# Altium PCB DiplomPCB.PcbDoc
Units mm, origin at the board's own origin, x right, y up, seen from the top; angles counter-clockwise.
Board outline 111.49 x 52.99 mm, 2 copper layers (Top Layer, Bottom Layer); 43 components, 35 nets, 199 pads, 49 vias.
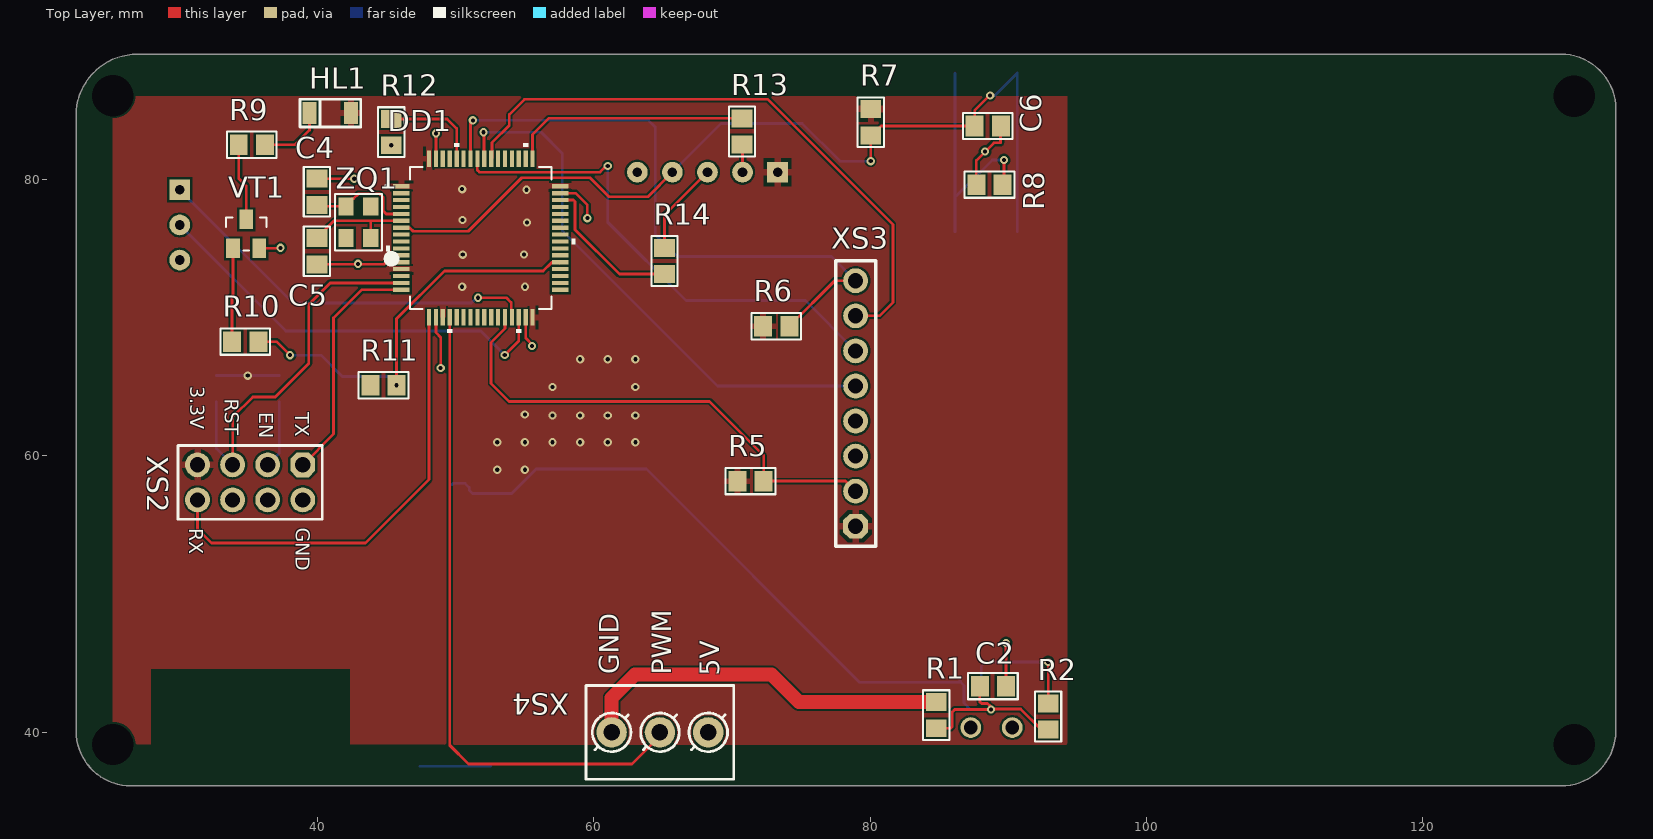
[diagram p0: Top Layer view]
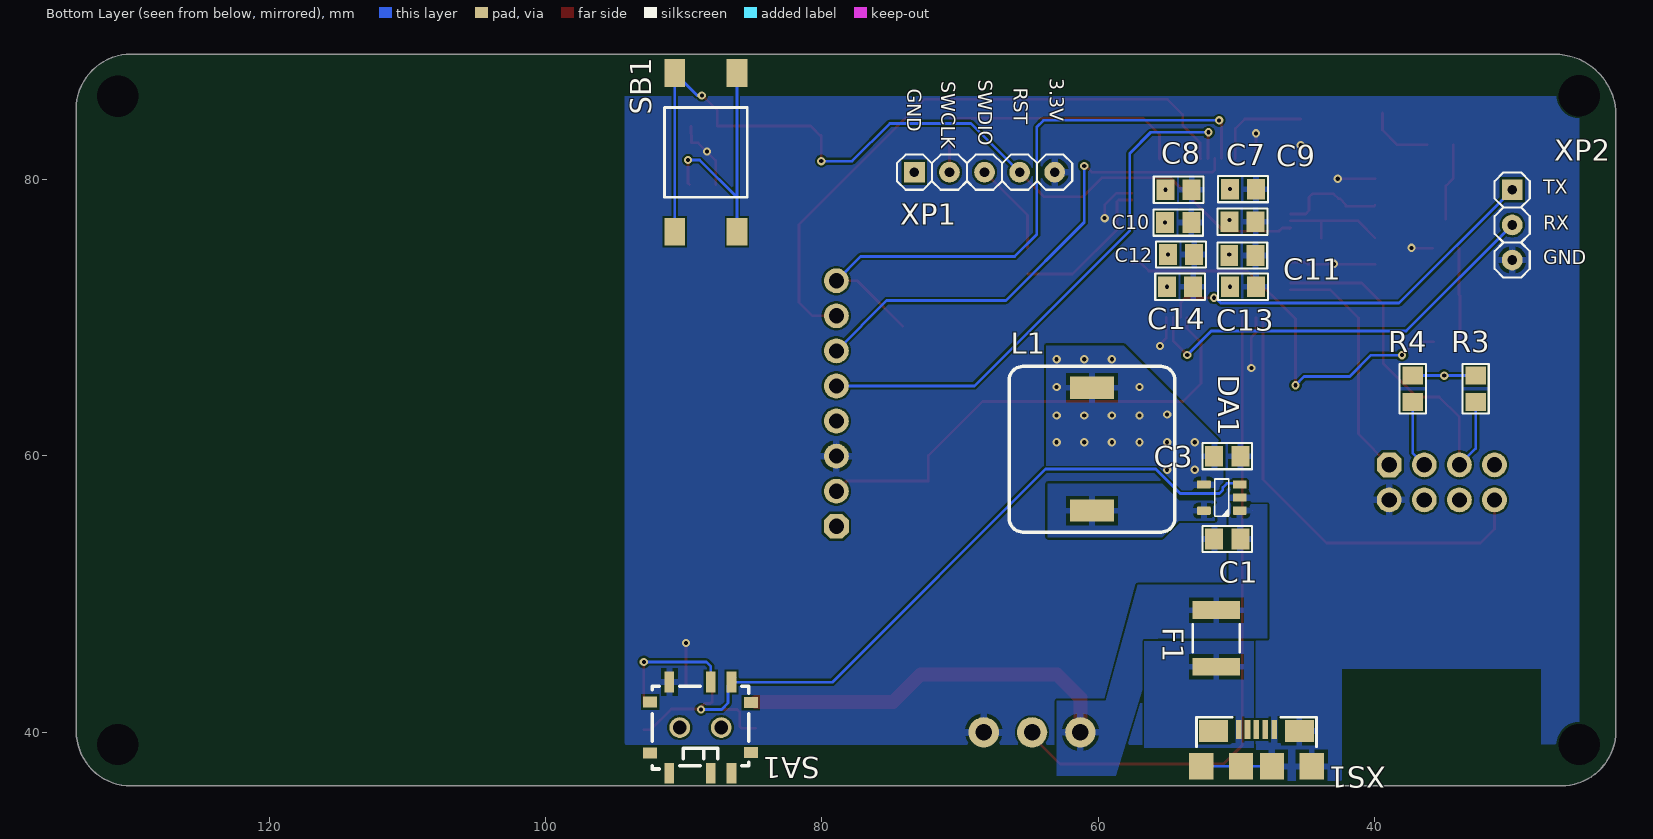
[diagram p1: Bottom Layer view, seen from below]

## Layer stack, top to bottom
Top Solder: solder mask 0.0102, Solder Resist, Dk 3.5
Top Layer: signal copper 0.0356
Dielectric 1: dielectric 0.32, FR-4, Dk 4.8
Bottom Layer: signal copper 0.0356
Bottom Solder: solder mask 0.0102, Solder Resist, Dk 3.5

## Board outline
26.475,36.109 cw(c26.475,40.075) 22.509,40.075 22.51,40.05 22.505,84.665 cw(c26.935,84.665) 26.935,89.094 26.84,89.1 130.02,89.1 130,89.1 cw(c130,85.1) 134,85.1 134,85.12 133.988,40.065 cw(c130.033,40.065) 130.033,36.11

## Design rules (kind name [scope] priority, off if disabled: settings)
Clearance [All] p1: gap=0.15 ignorepadtopadclearanceinfootprint=FALSE
PolygonConnect [All] p1: thpad.connectstyle=Relief thpad.reliefconductorwidth=0.5 thpad.reliefentries=4 thpad.polygonreliefangle="90 Angle" thpad.airgapwidth=0.25 smdpad.connectstyle=Relief smdpad.reliefconductorwidth=0.45 smdpad.reliefentries=4 smdpad.polygonreliefangle="90 Angle" smdpad.airgapwidth=0.25 via.connectstyle=Direct via.reliefconductorwidth=0.5 via.reliefentries=4 via.polygonreliefangle="90 Angle" via.airgapwidth=0.5
RoutingVias [All] p1: holewidth=0.3 width=0.6 viastyle="Through Hole" minholewidth=0.3 minwidth=0.6 maxholewidth=0.3 maxwidth=0.6
SMDEntry [All] p1: side=TRUE corner=TRUE anyangle=TRUE
SMDNeckDown [All] p1: percent=70.000
SMDToCorner [All] p1: distance=196850
SMDToPlane [All] p1: distance=196850
SolderMaskExpansion [All] p1: expansion=0.102 istentingtop=FALSE
UnRoutedNet [All] p1: checkbadconnections=TRUE
Width [All] p1: maxlimit=1 minlimit=0.15 preferedwidth=0.2
29 further rules are at their usual default settings.

## Components (designator, comment, footprint, x,y, rotation, side; value= is the part's Value field where it differs from the comment)
C1 "47p" C0805 50.64,53.99 r180 bottom
C2 "47p" C0805 88.89,43.335 r180 top
C3 "47p" C0805 50.64,59.99 r0 bottom
C4 "47p" C0805 39.94,79.132 r270 top
C5 "47p" C0805 39.94,74.832 r90 top
C6 "47p" C0805 88.52,83.89 r180 top
C7 "47p" C0805 49.51,79.322 r180 bottom
C8 "47p" C0805 54.17,79.282 r180 bottom
C9 "47p" C0805 49.54,76.962 r180 bottom
C10 "47p" C0805 54.2,76.9 r180 bottom
C11 "47p" C0805 49.55,74.522 r180 bottom
C12 "47p" C0805 53.99,74.592 r180 bottom
C13 "47p" C0805 49.51,72.252 r180 bottom
C14 "47p" C0805 54.06,72.252 r180 bottom
DA1 "SOT23-5" SOT23-5 51.04,56.99 r0 bottom
DD1 "STM32F103RDT6" LQFP64-10x10mm 51.81,75.782 r0 top
F1 "0.14A-60V" FUSRC4632X90N 51.44,46.79 r90 bottom
HL1 "LED, *, *, *, -55...+150°C" "LED: 1206R" 40.91,84.83 r180 top
L1 "2.2u" CDRH103R 60.44,60.49 r0 bottom
R1 "Resistor film, 100R, ±5%, 1206, 0.25W, -55...+125°C" R0805 84.79,41.235 r90 top value=100R
R2 "Resistor film, 100R, ±5%, 1206, 0.25W, -55...+125°C" R0805 92.89,41.135 r270 top value=100R
R3 "Resistor film, 100R, ±5%, 1206, 0.25W, -55...+125°C" R0805 32.66,64.87 r90 bottom value=100R
R4 "Resistor film, 100R, ±5%, 1206, 0.25W, -55...+125°C" R0805 37.21,64.87 r90 bottom value=100R
R5 "Resistor film, 100R, ±5%, 1206, 0.25W, -55...+125°C" R0805 71.34,58.18 r180 top value=100R
R6 "Resistor film, 100R, ±5%, 1206, 0.25W, -55...+125°C" R0805 73.2,69.4 r180 top value=100R
R7 "Resistor film, 100R, ±5%, 1206, 0.25W, -55...+125°C" R0805 80.04,84.17 r90 top value=100R
R8 "Resistor film, 100R, ±5%, 1206, 0.25W, -55...+125°C" R0805 88.64,79.65 r0 top value=100R
R9 "Resistor film, 100R, ±5%, 1206, 0.25W, -55...+125°C" R0805 35.23,82.54 r0 top value=100R
R10 "Resistor film, 100R, ±5%, 1206, 0.25W, -55...+125°C" R0805 34.75,68.28 r0 top value=100R
R11 "Resistor film, 100R, ±5%, 1206, 0.25W, -55...+125°C" R0805 44.76,65.12 r0 top value=100R
R12 "Resistor film, 100R, ±5%, 1206, 0.25W, -55...+125°C" R0805 45.325,83.45 r270 top value=100R
R13 "Resistor film, 100R, ±5%, 1206, 0.25W, -55...+125°C" R0805 70.725,83.5 r270 top value=100R
R14 "Resistor film, 100R, ±5%, 1206, 0.25W, -55...+125°C" R0805 65.11,74.12 r90 top value=100R
SA1 "SSSS820101" SSSS820101 88.79,40.335 r180 bottom
SB1 "Text" ПКн159-3_4-Series 88.4,81.98 r0 bottom value=ПКн159-3
VT1 "BSR802NL6327HTSA1" SOT23 34.82,76.09 r0 top
XP1 "SWD" PLS5R 73.3,80.55 r180 bottom
XP2 "Connector, 3pin, 2.54mm, 500VAC, 3A" PLS3R 30.01,79.27 r270 bottom
XS1 "USB micro B" "CON: USB micro-A (ZX62-B-5PA)" 48.531,40.19 r180 bottom
XS2 "Connector, 8pin, 2.54mm, 500VAC, 3A" "CON: PBD-8" 35.11,58.09 r180 top
XS3 "Connector, 8pin, 2.54mm, 500VAC, 3A" "CON: PBS-8" 78.95,63.8 r90 top
XS4 "Terminal connector, 3pin, 3.5mm, 300VAC, 10A" "CON: DG350-3.5-03P" 64.78,39.99 r0 top
ZQ1 "QSMD3.2x2.5x0.8" QSMD3.2x2.5x0.8 42.94,76.932 r90 top

## Footprints (in the part's own frame and the unit in brackets; to place one, negate y for a bottom-side part, rotate by r counter-clockwise, add the part's x,y. Pads: shape width x height; smd on the part's side, far side on the other; paste and mask are expansions set on the pad)
C0805 [mm] "IPC-SM-782 Capacitor 2.0x1.2 mm"
  rect 1.3x1.5 smd: 1(-0.95,0) 2(0.95,0)
  silkscreen extent -1.8,-0.95 1.8,0.95, body extent -1,-0.63 1,0.63, height 0.57
CDRH103R [mm] "Ind Power Shielded Wirewound"
  rect 3.2x1.6 smd: 1(0,4.45) 2(0,-4.45)
  silkscreen extent -6,-6 6,6, body extent -5.15,-5.22 5.15,5.28, height 4
"CON: DG350-3.5-03P" [mm]
  round 2.2 hole 1.2: 1(-3.5,0) 2(0,0) 3(3.5,0)
  round 0.5 on Top Overlay: ""(-4.85,-2.9)
  silkscreen extent -5.35,-3.4 5.35,3.4, body extent -5.75,-3.4 5.75,3.4, height 8.4
"CON: PBD-8" [mm] "PBD-8"
  oct 1.8x1.8 hole 1.1: 1(-3.81,-1.27)
  round 1.8 hole 1.1: 2(-3.81,1.27) 3(-1.27,-1.27) 4(-1.27,1.27) 5(1.27,-1.27) 6(1.27,1.27) 7(3.81,-1.27) 8(3.81,1.27)
  silkscreen extent -5.22,-2.68 5.22,2.67, body extent -7.3,-3.1 7.2,21.9, height 14.3
"CON: PBS-8" [mm] "PBS-8"
  oct 1.8x1.8 hole 1.1: 1(-8.89,0)
  round 1.8 hole 1.1: 2(-6.35,0) 3(-3.81,0) 4(-1.27,0) 5(1.27,0) 6(3.81,0) 7(6.35,0) 8(8.89,0)
  silkscreen extent -10.35,-1.45 10.35,1.45, body extent -20.34,-57.73 19.66,2.27, height 16.74
"CON: USB micro-A (ZX62-B-5PA)" [mm]
  rect 1.8x1.9 smd: 0(-4,-2.65) 0(4,-2.65)
  rect 2.1x1.6 smd: 0(-3.1,-0.1) 0(3.1,-0.1)
  rect 1.75x1.9 smd: 0(-1.125,-2.65) 0(1.125,-2.65)
  rect 0.4x1.4 smd: 1(-1.3,0) 2(-0.65,0) 3(0,0) 4(0.65,0) 5(1.3,0)
  round 0.5 on Bottom Overlay: ""(-4.85,0.75)
  silkscreen extent -4.35,-1.25 4.35,0.9, body extent -3.9,-4.8 3.9,0.2, height 2.68
FUSRC4632X90N [mm] "Chip Resettable Fuse, 2-Leads, Body 4.6x3.2mm, IPC Medium Density"
  rect 1.3x3.45 smd: 1(-2.05,0) 2(2.05,0)
  silkscreen extent -1,-1.7 1,1.7, body extent -2.36,-1.7 2.37,1.71, height 0.89
"LED: 1206R" [mm]
  rect 1x1.6 smd: 1(-1.5,0) 2(1.5,0)
  silkscreen extent -2.2,-1 2.2,1, body extent -1.6,-0.8 1.6,0.8, height 1.1
LQFP64-10x10mm [mil]
  rect 47x12 smd paste+0 mask+0: 1(-226.38,147.64) 2(-226.38,127.95) 3(-226.38,108.27) 4(-226.38,88.58) 5(-226.38,68.9) 6(-226.38,49.21) 7(-226.38,29.53) 8(-226.38,9.84) 9(-226.38,-9.84) 10(-226.38,-29.53) 11(-226.38,-49.21) 12(-226.38,-68.9) 13(-226.38,-88.58) 14(-226.38,-108.27) 15(-226.38,-127.95) 16(-226.38,-147.64) 33(226.38,-147.64) 34(226.38,-127.95) 35(226.38,-108.27) 36(226.38,-88.58) 37(226.38,-68.9) 38(226.38,-49.21) 39(226.38,-29.53) 40(226.38,-9.84) 41(226.38,9.84) 42(226.38,29.53) 43(226.38,49.21) 44(226.38,68.9) 45(226.38,88.58) 46(226.38,108.27) 47(226.38,127.95) 48(226.38,147.64)
  rect 12x47 smd paste+0 mask+0: 17(-147.64,-226.38) 18(-127.95,-226.38) 19(-108.27,-226.38) 20(-88.58,-226.38) 21(-68.9,-226.38) 22(-49.21,-226.38) 23(-29.53,-226.38) 24(-9.84,-226.38) 25(9.84,-226.38) 26(29.53,-226.38) 27(49.21,-226.38) 28(68.9,-226.38) 29(88.58,-226.38) 30(108.27,-226.38) 31(127.95,-226.38) 32(147.64,-226.38) 49(147.64,226.38) 50(127.95,226.38) 51(108.27,226.38) 52(88.58,226.38) 53(68.9,226.38) 54(49.21,226.38) 55(29.53,226.38) 56(9.84,226.38) 57(-9.84,226.38) 58(-29.53,226.38) 59(-49.21,226.38) 60(-68.9,226.38) 61(-88.58,226.38) 62(-108.27,226.38) 63(-127.95,226.38) 64(-147.64,226.38)
  silkscreen extent -273,-270 270,270, body extent -231,-231 241,241, height 63
PLS3R [mm] "DS1021 Male Connector 3 pins 2.54 mm Corner"
  rect 1.5x1.5 hole 0.7: 1(0,0)
  round 1.5 hole 0.7: 2(2.54,0) 3(5.08,0)
  silkscreen extent -1.27,-1.27 6.35,1.27, body extent -1.27,-1.27 6.35,7.35, height 5.45
PLS5R [mm] "DS1021 Male Connector 5 pin 2.54 mm Corner"
  rect 1.5x1.5 hole 0.7: 1(0,0)
  round 1.5 hole 0.7: 2(2.54,0) 3(5.08,0) 4(7.62,0) 5(10.16,0)
  silkscreen extent -1.27,-1.27 11.43,1.27, body extent -1.27,-1.27 11.43,7.35, height 5.45
QSMD3.2x2.5x0.8 [mm] "Quartz Crystal SMD 3.2x2.5x0.8 mm"
  rect 1.3x1.1 smd: 1(-1.15,-0.9) 2(1.15,-0.9) 3(1.15,0.9) 4(-1.15,0.9)
  silkscreen extent -3.15,-2.9 2.05,1.7, body extent -1.61,-1.25 1.61,1.25, height 0.81
R0805 [mm] "IPC-SM-782 Resistor 2.0x1.2 mm"
  rect 1.3x1.5 smd: 1(-0.95,0) 2(0.95,0)
  silkscreen extent -1.8,-0.95 1.8,0.95, body extent -1.15,-0.67 1.15,0.68, height 0.76
SOT23 [mm] "IPC-SM-782 Small Outline Transistor"
  rect 1x1.4 smd: 1(-0.95,-1.05) 2(0.95,-1.05) 3(0,1.05)
  silkscreen extent -1.46,-1.2 1.46,1.17, body extent -1.46,-1.17 1.46,1.17, height 1
SOT23-5 [mm]
  round 0.5 on Mech15: 0(0,0)
  rrect25% 1x0.6 smd: 1(-1.3,0.95) 2(-1.3,0) 3(-1.3,-0.95) 4(1.3,-0.95) 5(1.3,0.95)
  silkscreen extent -0.51,-1.35 0.51,1.35, body extent -1.4,-1.45 1.4,1.45, height 1.44
SSSS820101 [mm] "Vertical angle SMD 2 position key"
  rect 0.7x1.5 smd: 1(-2.25,3.3) 2(0.75,3.3) 3(2.25,3.3) 4(-2.25,-3.3) 5(0.75,-3.3) 6(2.25,-3.3)
  rect 1x0.8 smd: GND(-3.65,-1.85) GND(-3.65,1.85) GND(3.65,-1.8) GND(3.65,1.8)
  round 1.5 hole 1: GND(-1.5,0) GND(1.5,0)
  silkscreen extent -3.5,-3 3.5,3, body extent -3.25,-2.75 3.25,2.75, height 3
ПКн159-3_4-Series [mm]
  rect 1.5x2 smd: 1(-2.25,-5.75) 1(-2.25,5.75) 2(2.25,-5.75) 2(2.25,5.75)
  silkscreen extent -3,-3.25 3,3.25, body extent -3,-5.18 3,5.18, height 7.33

## Part data
C1 C2 C3 C4 C5 C6 C7 C8 C9 C10 C11 C12 C13 C14: library part CC1206_47PF_100V_10%_NP0, "Non-polarised capacitor", Case=1206, Manufacturer=GENERIC, Manufacturer1 ComponentHeight=0.94mm, Manufacturer1 Example=AVX, Manufacturer1 Part Number=12061A470JAT2A, Tolerance=±10%, Voltage=100V, Author="CERN DEM JLC", Component Type=Standard, CreateDate=24-Aug-09, HelpURL=\\cern.ch\dfs\Applications\Altium\Datasheets\CC1206_NP0_AVX.pdf, LatestRevisionDate=24-Aug-09, Manufacturer Part Number=CC1206_47PF_100V_10%_NP0, Mounted=Yes, Part Description="SMD Multilayer Chip Ceramic Capacitor", Part Number=CC1206_47PF_100V_10%_NP0, Pin Count=2, SMD=Yes, Socket=No, Status=Preferred, TC=NP0
DA1: library part LM3671MF-3.3/NOPB, "GOST DC-DC Step-down converter 2.7-5.5 to 3.3V 600mA output"
DD1: "No Description Available", Built_By=EMA_UL_Team, Copyright="Copyright (C) 2018 Accelerated Designs. All rights reserved", Manufacturer_Part_Number=STM32F103RDT6, RefDes=RefDes, SourceLibrary=Updates_to_database_2020-10-19, Type=DEV, Vendor=STMicroelectronics
F1: library part FUSR1812_TYCO-miniSMD0114F, "Fuse", Manufacturer="TYCO ELECTRONICS", Manufacturer Part Number=miniSMDC014F, Author="CERN DEM JLC", Component Type=Standard, ComponentHeight=0.89mm, CreateDate=02-Jul-08, Family="Fuses Resettable", HelpURL=\\cern.ch\dfs\Applications\Altium\Datasheets\FUSR_TYCO_MiniSMD0114F.pdf, LatestRevisionDate=17-Mar-10, Mounted=Yes, PackageDescription="Chip Resettable Fuse, 2-Leads, Body 4.6x3.2mm, IPC Medium Density", Part Description="PolySwitch® PTC Overcurrent Protection Device", Part Number=FUSR1812_TYCO-miniSMD0114F, Pin Count=2, SMD=Yes, Socket=No
HL1: library part LED_single, Color=GREEN, Temperature=-55...+150°C, TypeDiode=LED, ValueManufacturerPartNumber="LED, *, *, *, -55...+150°C"
L1: library part Inductive, "GOST inductive"
R1 R2 R3 R4 R5 R6 R7 R8 R9 R10 R11 R12 R13 R14: library part Resistor_1206, Manufacturer=Yageo, Package=1206, PartNumber=RC1206JR-07100RL, Power=0.25W, Temperature=-55...+125°C, Tolerance=±5%, TypeResistor="Resistor film", HelpURL=https://www.digikey.com/product-detail/en/yageo/RC1206JR-07100RL/311-100ERCT-ND/732153, ValueManufacturerPartNumber="Resistor film, 100R, ±5%, 1206, 0.25W, -55...+125°C"
SA1: library part Button_Perekluchatel, "GOST Button Perekluchatel"
SB1: library part ПКн159-3, Isolator Resistance=1000meg, Limit Current=50mA, Limit Voltage=15V, Resistance=0.1ohm, Working Temperature Max=+60°С, Working Temperature Min=-60°С, Application Category=1, Backlight=NO, Height=5.2mm, ID=24, Number of Contacts=4, Part Number=ПКн159-3, Published=17.04.2014, Publisher="Andrew Danich", Specification="АУБК.642130.004 ТУ", Type=Переключатель
VT1: library part MOSFET_N, "GOST MOSFET N-channel transistor"
XP1: "Serial Wire Debugging", ComponentLink1Description="Datasheet for Hitec Servo", ComponentLink1URL=https://www.arm.com/files/pdf/Serial_Wire_Debug.pdf, Published=24.01.2018, Publisher="Kernel Laboratory", Version=1.0
XP2: library part PLS-3, CurrentMax=3A, Manufacturer=Connfly, VoltageMax=500VAC, CommentText="\"Разъем\"", HelpURL=https://www.chipdip.ru/product/pls-3, Multichannel=3pin, PartNumber=PLS-3, Pitch=2.54mm, TypeConnector=Connector, ValueManufacturerPartNumber="Connector, 3pin, 2.54mm, 500VAC, 3A"
XS1: library part Connector_USB_micro_B, Manufacturer="Hirose Electric", PartNumber=ZX62-B-5PA, CommentText="\"USB\"", HelpURL=https://www.digikey.com/product-detail/en/hirose-electric-co-ltd/ZX62-B-5PA/H11579CT-ND/1851090, TypeConnector="USB micro B", ValueManufacturerPartNumber="USB micro B"
XS2: library part PBD-8, CurrentMax=3A, Manufacturer=Connfly, VoltageMax=500VAC, CommentText="\"Разъем\"", HelpURL=https://www.chipdip.ru/product/pbd-8, Multichannel=8pin, PartNumber=PBD-8, Pitch=2.54mm, TypeConnector=Connector, ValueManufacturerPartNumber="Connector, 8pin, 2.54mm, 500VAC, 3A"
XS3: library part PBS-8, CurrentMax=3A, Manufacturer=Connfly, VoltageMax=500VAC, CommentText="\"Разъем\"", HelpURL=https://www.chipdip.ru/product/pbs-8, Multichannel=8pin, PartNumber=PBS-8, Pitch=2.54mm, TypeConnector=Connector, ValueManufacturerPartNumber="Connector, 8pin, 2.54mm, 500VAC, 3A"
XS4: library part Connector_terminal_3pin, CurrentMax=10A, Manufacturer=Degson, PartNumber=DG350-3.5-03P-14, VoltageMax=300VAC, CommentText="\"Разъем\"", HelpURL=https://www.chipdip.ru/product/dg350-3.5-03p-12, Multichannel=3pin, Pitch=3.5mm, TypeConnector="Terminal connector", ValueManufacturerPartNumber="Terminal connector, 3pin, 3.5mm, 300VAC, 10A"
ZQ1: library part Quartz, "GOST Quartz"

## Free pads (board coordinates)
  round 0 hole 3: 4(25.16,39.11) 4(25.16,86.1) 4(131,39.11) 4(131,86.06)

## Via types
v1: diameter 0.6, hole 0.3, Top Layer to Bottom Layer, 49 vias

## Nets (pads, with @x,y where several pads share a name; then routed paths per layer and width w, separated by ;. In a path a pad name is that pad's centre, name@x,y a point inside that pad or via, vN(x,y) a via of type N, cw(c..) or ccw(c..) an arc to the next point about the centre after c; other vN are vias at no path point)
+3.3: C3.2 C7.1 C8.1 C9.1 C10.1 C11.1 C12.1 C13.1 C14.1 DA1.4 DD1.1 DD1.13 DD1.19 DD1.32 DD1.48 DD1.64 HL1.1 L1.2 R3.2 R4.2 R5.2 R6.2 R7.2 XP1.1 XS2.7 XS3.1 | length 4.6
  Bottom Layer w0.2: R3.2 R4.2
  other v1: 53,59 54.999,59.001 53,61 55,61 57,61 59,61 61,61 63,61 57,62.925 59,62.925 61,62.925 63,62.925 55,63 57,65 63,65 34.935,65.82 59,67 61,67 63,67 50.46,72.252 55.01,72.252 50.5,74.582 54.94,74.592 55.15,76.9 50.49,77.082 55.12,79.282 50.46,79.322
+5: C1.2 DA1.1 F1.2 R1.2 XS4.1 | length 27.5
  Top Layer w1: XS4.1 61.28,42.483 62.972,44.175 72.85,44.175 74.84,42.185 R1.2
GND: C1.1 C2.1 C3.1 C4.1 C5.1 C6.1 C7.2 C8.2 C9.2 C10.2 C11.2 C12.2 C13.2 C14.2 DA1.2 DD1.12 DD1.18 DD1.31 DD1.47 DD1.63 R8.1 R12.2 SA1.1 VT1.2 XP1.5 XP2.3 XS1.0@44.531,37.54 XS1.0@45.431,40.09 XS1.0@47.406,37.54 XS1.0@49.656,37.54 XS1.0@52.531,37.54 XS1.5 XS2.2 XS3.3 XS4.3 | length 35.1
  Top Layer w0.2: VT1.2 37.28,75.04 v1(37.31,75.07) ; C5.1 44.813,73.882 44.963,74.032 DD1.12 ; C4.1 42.628,80.082 v1(42.64,80.07) ; DD1.18 48.56,68.935 48.9,68.595 v1(48.9,66.375) ; DD1.63 v1(48.56,83.36) ; DD1.31 55.06,68.538 55.52,68.078 v1(55.52,67.97) ; DD1.47 58.657,79.032 59.525,78.164 v1(59.525,77.225) ; R8.1 87.69,81.411 88.956,82.677 89.444,82.677 C6.1 ; C2.1 v1(89.84,46.465) v1@89.85,46.475
  Bottom Layer w0.2: XS1.0@47.406,37.54 49.656,37.54 XS1.0@52.531,37.54
  other v1: 42.91,73.91 88.323,82.044 45.325,82.5
NetC2_2: C2.2 DA1.3 R1.1 R2.2 SA1.3 | length 60.8
  Top Layer w0.2: R1.1 85.833,40.285 85.95,40.402 85.95,41.475 86.125,41.65 v1(88.75,41.65) ; C2.2 87.94,42.204 88.057,42.086 88.504,42.086 88.673,41.917 88.673,41.727 v1(88.75,41.65) ; R2.2 92.39,40.185 90.9,41.675 88.775,41.675 v1(88.75,41.65)
  Bottom Layer w0.2: DA1.3 49.818,58.018 50.66,58.018 50.968,57.711 50.968,57.524 51.217,57.275 54.05,57.275 55.825,59.05 63.81,59.05 79.248,43.612 SA1.3@86.54,43.612 ; SA1.3@86.29,43.959 86.54,43.709 SA1.3 86.79,43.385 86.79,42.11 87.25,41.65 v1(88.75,41.65)
NetC4_2: C4.2 DD1.5 ZQ1.3 | length 7.8
  Top Layer w0.2: C4.2 40.04,78.082 ZQ1.3 42.04,78.182 42.49,78.632 42.59,78.632 42.94,78.982 44.494,78.982 44.728,78.747 44.728,77.767 44.963,77.532 DD1.5
NetC5_2: C5.2 DD1.6 ZQ1.1 | length 7.9
  Top Layer w0.2: C5.2 41.19,77.032 43.84,77.032 ; ZQ1.1 43.84,77.032 ; DD1.6 43.84,77.032
NetDA1_5: DA1.5 L1.1
NetDD1_15: DD1.15 R3.1 XS2.5 | length 27.3
  Top Layer w0.2: XS2.5 33.84,62.815 35.3,64.275 36.925,64.275 39.35,66.7 39.35,70.975 40.907,72.532 DD1.15
  Bottom Layer w0.2: R3.1 32.66,60.54 XS2.5
NetDD1_16: DD1.16 XS2.1 | length 17.3
  Top Layer w0.2: XS2.1 41.15,61.59 41.15,70.002 43.18,72.032 DD1.16
NetDD1_17: DD1.17 XS2.8 | length 32.9
  Top Layer w0.2: XS2.8 31.3,54.7 32.3,53.7 43.467,53.7 48.06,58.293 DD1.17
NetDD1_20: DD1.20 XS4.2 | length 47.9
  Top Layer w0.2: DD1.20 49.56,39.052 50.912,37.7 62.75,37.7 64.78,39.73 XS4.2
NetDD1_28: DD1.28 R5.1 XS3.2 | length 35.9
  Top Layer w0.2: DD1.28 53.56,69.232 52.55,68.222 52.55,65.25 53.85,63.95 68.375,63.95 72.29,60.035 R5.1 78.22,58.18 XS3.2
NetDD1_29: DD1.29 XP2.1 | length 28.8
  Top Layer w0.2: v1(51.609,71.457) 53.668,71.457 54.008,71.117 54.008,70.084 DD1.29
  Bottom Layer w0.2: XP2.1 38.204,71.076 51.119,71.076 51.501,71.457 v1(51.609,71.457)
NetDD1_30: DD1.30 XP2.2 | length 30.6
  Top Layer w0.2: v1(53.543,67.31) 54.56,68.327 DD1.30
  Bottom Layer w0.2: XP2.2 37.69,69.05 51.803,69.05 v1(53.543,67.31)
NetDD1_37: DD1.37 R10.2 R11.2 | length 29.8
  Top Layer w0.2: R10.2 37.02,68.28 v1(38,67.3) ; v1(45.71,65.12) 45.71,69.935 49.175,73.4 56.325,73.4 56.957,74.032 DD1.37 DD1.37@57.508,73.98
  Bottom Layer w0.2: v1(38,67.3) 40.225,67.3 41.775,65.75 45.08,65.75 v1(45.71,65.12)
NetDD1_46: DD1.46 R14.1 | length 11
  Top Layer w0.2: DD1.46 58.521,78.532 58.638,78.415 58.638,76.382 61.85,73.17 R14.1
NetDD1_49: DD1.49 R13.1 | length 17.4
  Top Layer w0.2: DD1.49@55.56,81.509 DD1.49 55.56,83.285 56.725,84.45 R13.1
NetDD1_55: DD1.55 XS3.7 | length 44.5
  Top Layer w0.2: DD1.55 52.612,81.584 52.612,82.687 53.875,83.95 53.875,84.725 54.975,85.825 72.595,85.825 81.65,76.77 81.65,71.125 80.675,70.15 XS3.7
NetDD1_56: DD1.56 XS3.5 | length 39.8
  Top Layer w0.2: v1(52.01,83.439) 52.035,83.414 52.035,81.557 DD1.56
  Bottom Layer w0.2: v1(52.01,83.439) 56.186,83.439 57.7,81.925 57.7,76.325 68.955,65.07 XS3.5
NetDD1_57: DD1.57 XS3.6 | length 36.4
  Top Layer w0.2: DD1.57 51.56,80.691 51.701,80.55 60.442,80.55 60.892,81 v1(61,81)
  Bottom Layer w0.2: v1(61,81) 61,76.925 66.675,71.25 75.31,71.25 XS3.6
NetDD1_58: DD1.58 R6.1 XS3.8 | length 46.1
  Top Layer w0.2: DD1.58 51.06,84.131 v1(51.232,84.303) ; R6.1 77.44,72.69 XS3.8
  Bottom Layer w0.2: v1(51.232,84.303) 63.957,84.303 64.44,83.82 64.44,76.048 66.04,74.447 77.193,74.447 XS3.8
NetDD1_60: DD1.60 R12.1 | length 7.2
  Top Layer w0.2: R12.1 49.375,84.4 50.06,83.715 DD1.60
NetF1_1: F1.1 XS1.1
NetHL1_2: HL1.2 R9.2 | length 4.9
  Top Layer w0.2: R9.2 38.359,82.54 39.41,83.591 HL1.2
NetR2_1: R2.1 SA1.2 | length 9.1
  Top Layer w0.2: R2.1 v1(92.89,45.085)
  Bottom Layer w0.2: SA1.2 88.04,44.767 88.358,45.085 v1(92.89,45.085)
NetR4_1: R4.1 XS2.3 | length 4.9
  Bottom Layer w0.2: XS2.3 37.21,60.19 R4.1
NetR8_2: R8.2 SB1.1 | length 18
  Top Layer w0.2: R8.2 89.69,79.75 v1(89.69,81.43)
  Bottom Layer w0.2: SB1.1@86.15,76.23 86.15,78.733 ; SB1.1@86.15,87.73 86.15,78.733 ; v1(89.69,81.43) 88.847,81.43 86.15,78.733
NetR9_1: R9.1 VT1.3 | length 5.6
  Top Layer w0.2: R9.1 34.28,80.093 34.82,79.553 VT1.3
NetR10_1: R10.1 VT1.1 | length 6.8
  Top Layer w0.2: R10.1 33.8,71.603 33.87,71.673 VT1.1
NetR13_2: R13.2 XP1.2 | length 2
  Top Layer w0.2: R13.2 70.76,82.515 XP1.2
NetR14_2: R14.2 XP1.3 | length 6.8
  Top Layer w0.2: R14.2 65.11,77.44 XP1.3
NetXS2_4: XS2.4
NetXS2_6: XS2.6
NetXS3_4: XS3.4
RST: C6.2 DD1.7 R7.1 SB1.2 XP1.4 | length 66.1
  Top Layer w0.2: DD1.7 DD1.7@46.086,76.506 ; DD1.7@46.112,76.48 DD1.7@46.086,76.506 ; XP1.4 63.905,78.775 61.1,78.775 59.725,80.15 54.775,80.15 50.9,76.275 46.92,76.275 46.689,76.506 DD1.7@46.086,76.506 ; v1(80.04,81.35) R7.1 80.14,83.22 80.69,83.77 80.69,83.773 80.807,83.89 C6.2 87.57,85.023 88.647,86.1 v1(88.69,86.1)
  Bottom Layer w0.2: XP1.4 69.21,84.08 75.08,84.08 77.81,81.35 v1(80.04,81.35) ; v1(88.69,86.1) 89.02,86.1 90.65,87.73 SB1.2@90.65,76.23
pads on no net: DA1.0 DD1.2 DD1.3 DD1.4 DD1.8 DD1.9 DD1.10 DD1.11 DD1.14 DD1.21 DD1.22 DD1.23 DD1.24 DD1.25 DD1.26 DD1.27 DD1.33 DD1.34 DD1.35 DD1.36 DD1.38 DD1.39 DD1.40 DD1.41 DD1.42 DD1.43 DD1.44 DD1.45 DD1.50 DD1.51 DD1.52 DD1.53 DD1.54 DD1.59 DD1.61 DD1.62 R11.1 SA1.4 SA1.5 SA1.6 SA1.GND XS1. XS1.0@51.631,40.09 XS1.2 XS1.3 XS1.4 XS4. ZQ1.2 ZQ1.4

## Polygon pours and split planes (outlines as drawn)
GND on Bottom Layer "GND_L02_P008" (solid, pour order 8): 48.531,39.109 48.531,36.49 42.35,36.49 42.34,36.5 42.35,36.51 42.35,44.58 27.91,44.58 27.91,39.113 25.16,39.11 25.16,86.1 25.2,86.06 94.29,86.06 94.29,39.1
+3.3 on Bottom Layer "+3.3_L02_P000" (solid, pour order 0): 50.94,57.49 54.14,57.49 55.74,59.09 63.74,59.09 63.74,68 58.15,68 50.94,60.79
NetDA1_5 on Bottom Layer "NETDA1_5_L02_P002" (solid, pour order 2): 51.54,56.768 51.54,55.312 54.148,55.312 55.352,54.107 63.652,54.107 63.652,58.007 55.352,58.007 54.113,56.768
+5 on Bottom Layer "+5_L02_P004" (solid, pour order 4): 50.54,50.69 50.54,56.49 47.74,56.49 47.74,46.79 55.66,46.79 58.71,36.84 63,36.84 63,42.28 59.44,42.28 57.14,50.69
NetF1_1 on Bottom Layer "NETF1_1_L02_P001" (solid, pour order 1): 48.74,40.59 48.74,38.89 56.64,38.89 56.64,46.59 48.74,46.59
+3.3 on Top Layer "+3.3_L01_P007" (solid, pour order 7): 42.35,39.11 42.35,44.58 27.91,44.58 27.91,39.113 25.16,39.11 25.16,86.1 25.2,86.06 94.29,86.06 94.29,39.1

## Silkscreen, mask and mechanical layers (free items; w line width, h text height)
Top Overlay:
  text "3.3V" at 30.78,65.06 h1 r270
  text "RST" at 33.28,64.16 h1 r270
  text "EN" at 35.78,63.16 h1 r270
  text "TX" at 38.38,63.16 h1 r270
  text "GND" at 38.41,54.79 h1 r270
  text "RX" at 30.68,54.76 h1 r270
  text "GND" at 61.8,44.19 h1.4 r90
  text "PWM" at 65.59,44.15 h1.4 r90
  text "5V" at 69.08,44.07 h1.4 r90
Bottom Overlay:
  text "3.3V" at 63.49,87.34 h1 r90
  text "SWDIO" at 68.69,87.24 h1 r90
  text "SWCLK" at 71.36,87.13 h1 r90
  text "RST" at 66.11,86.67 h1 r90
  text "GND" at 73.81,86.58 h1 r90
  text "TX" at 27.75,78.98 h1
  text "RX" at 27.75,76.38 h1
  text "GND" at 27.75,73.88 h1
Mechanical 30:
  lines w0.254: 22.509,40.075 ccw(c26.475,40.075) 26.475,36.109 ; 22.51,40.05 22.505,84.665 cw(c26.935,84.665) 26.935,89.094 ; 26.46,36.11 130.033,36.11 ccw(c130.033,40.065) 133.988,40.065 134,85.12 ; 26.84,89.1 130.02,89.1 ; 130,89.1 cw(c130,85.1) 134,85.1